# Altium PCB PCB_simple.PcbDoc
Units mil, origin at the board's own origin, x right, y up, seen from the top; angles counter-clockwise.
Board outline 3000 x 2000 mil, 2 copper layers (Top Layer, Bottom Layer), stack 60.4 mil thick; 65 components, 51 nets, 204 pads, 0 vias.
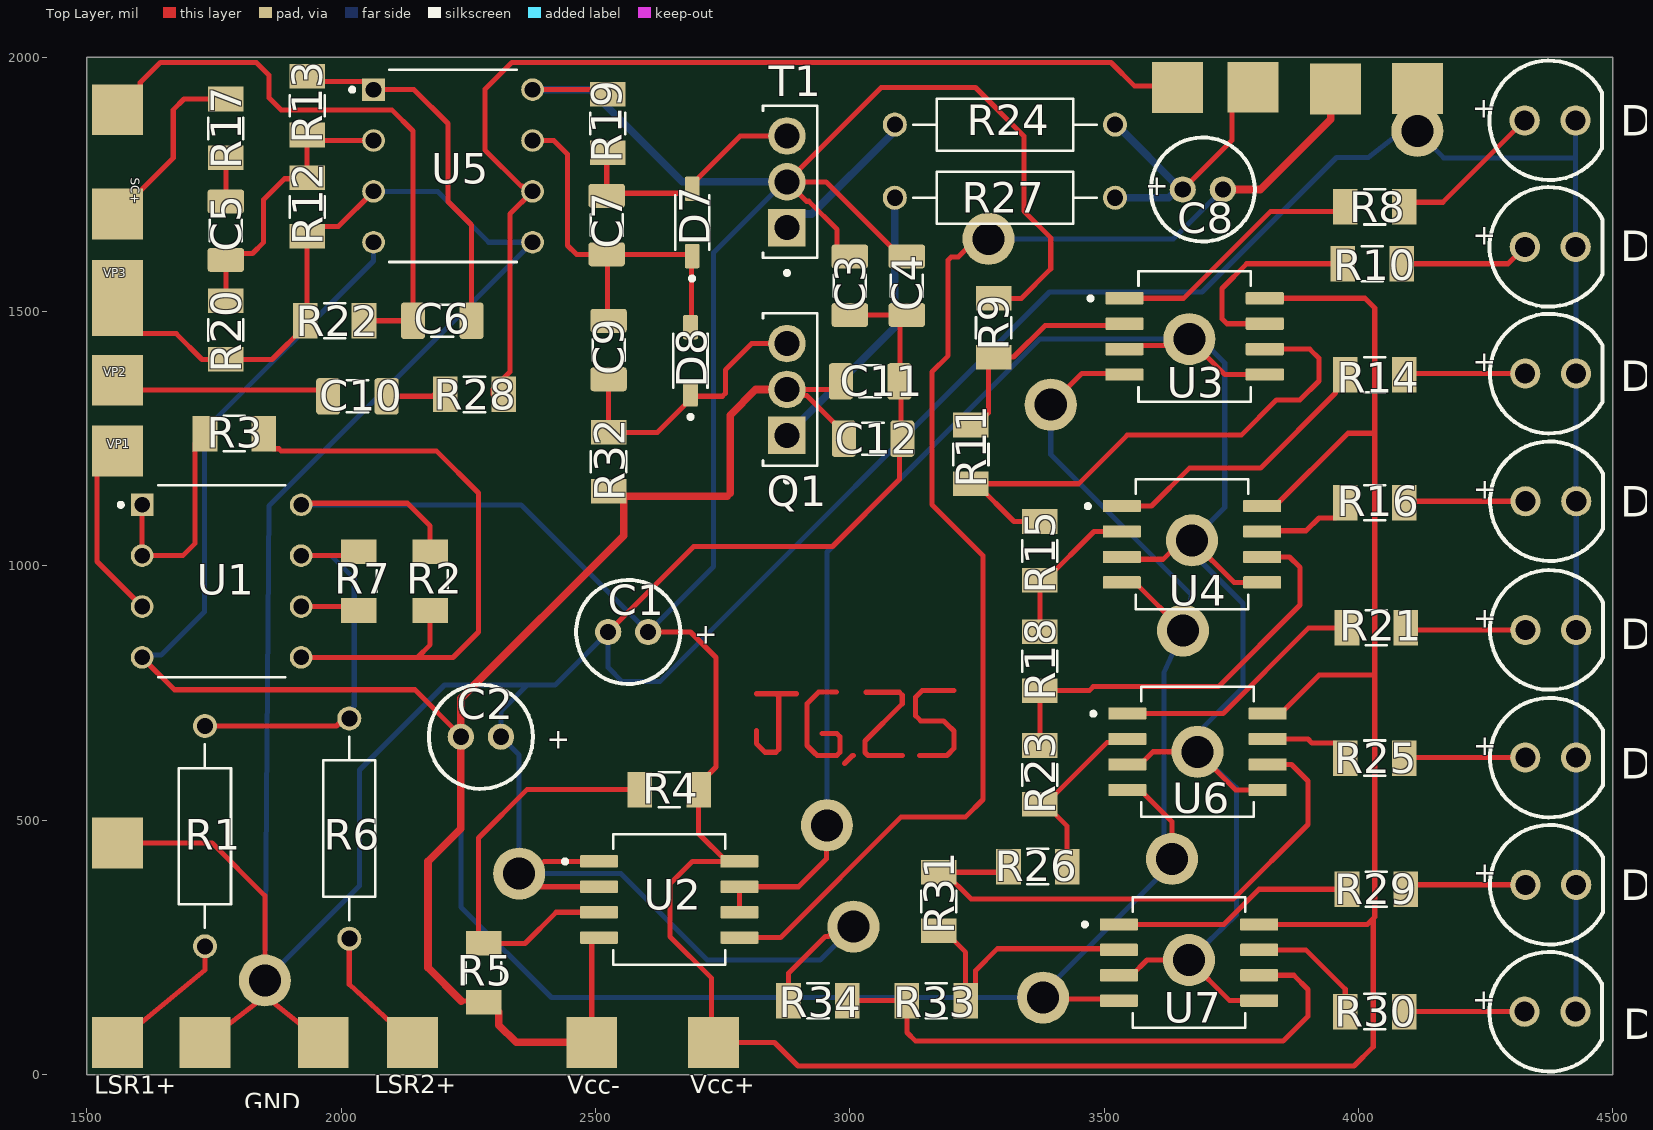
[diagram p0: Top Layer view]
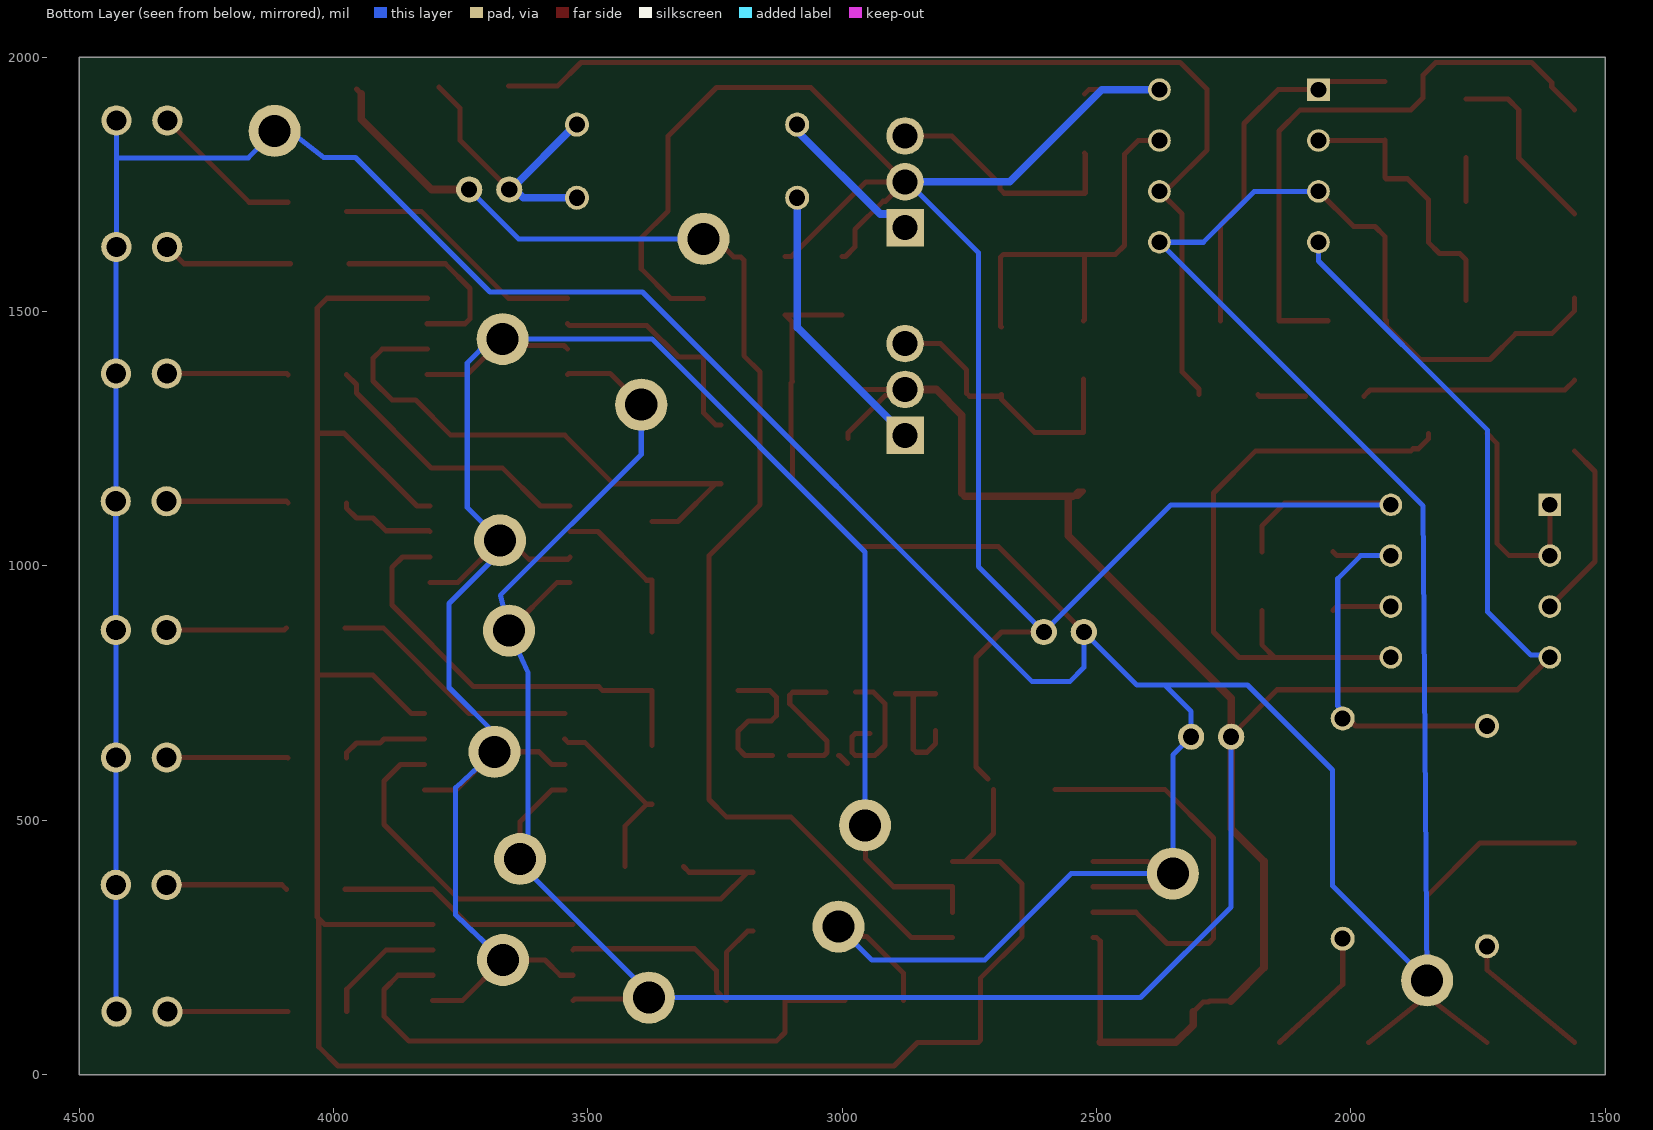
[diagram p1: Bottom Layer view, seen from below]
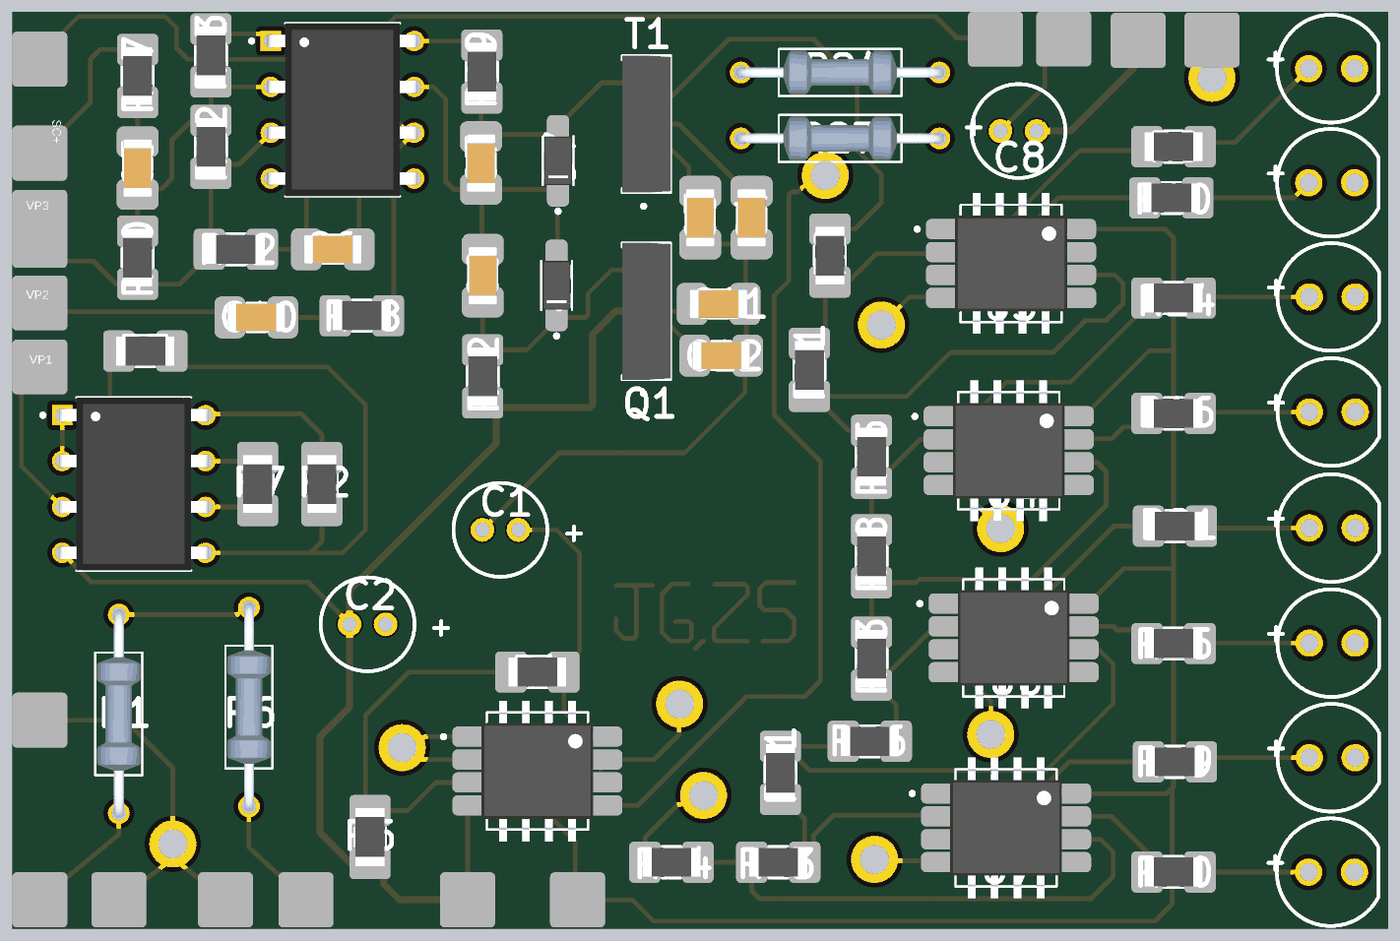
[diagram p2: 3D render of the assembled board from above, using the file's embedded part models]

## Layer stack, top to bottom
Top Solder: solder mask 0.5, Solder Resist, Dk 3.3
Top Layer: signal copper 0.7
Dielectric1: core 59, FR-4, Dk 4.3
Bottom Layer: signal copper 0.7
Bottom Solder: solder mask 0.5, Solder Resist, Dk 3.3

## Board outline
1500,0 4500,0 4500,2000 1500,2000

## Design rules (kind name [scope] priority, off if disabled: settings)
Clearance [All] p1: gap=10 ignorepadtopadclearanceinfootprint=FALSE
DiffPairsRouting [All] p1: maxlimit=10 minlimit=10 mostfreqgap=10 toplayer_minwidth=10 toplayer_maxwidth=10 toplayer_prefwidth=10 bottomlayer_minwidth=10 bottomlayer_maxwidth=10 bottomlayer_prefwidth=10 maxuncoupledlength=500
HoleSize [All] p1: absolutevalues=TRUE maxlimit=300 minlimit=10 maxpercent=80.000 minpercent=20.000
MinimumAnnularRing [All] p1: minimumring=10
MinimumSolderMaskSliver [All] p1: minsoldermaskwidth=19.68
PasteMaskExpansion [All] p1: expansion=10
PlaneClearance [All] p1: clearance=15
PlaneConnect [All] p1: pad.planeconnectstyle=Relief pad.reliefexpansion=20 pad.reliefentries=4 pad.reliefconductorwidth=10 pad.reliefairgap=10 via.planeconnectstyle=Direct via.reliefexpansion=20 via.reliefentries=4 via.reliefconductorwidth=10 via.reliefairgap=10
PolygonConnect [All] p1: thpad.connectstyle=Relief thpad.reliefconductorwidth=10 thpad.reliefentries=4 thpad.polygonreliefangle="90 Angle" thpad.airgapwidth=10 smdpad.connectstyle=Relief smdpad.reliefconductorwidth=10 smdpad.reliefentries=4 smdpad.polygonreliefangle="90 Angle" smdpad.airgapwidth=10 via.connectstyle=Direct via.reliefconductorwidth=10 via.reliefentries=4 via.polygonreliefangle="90 Angle" via.airgapwidth=10
RoutingVias [All] p1: holewidth=10 width=20 viastyle="Through Hole" minholewidth=10 minwidth=20 maxholewidth=10 maxwidth=20
SMDNeckDown [All] p1: percent=100.000
SilkToSolderMaskClearance SilkscreenOverComponentPads [IsPad] p1: minsilkscreentomaskgap=10 clearancetoexposedcopper=TRUE
SolderMaskExpansion [All] p1: expansion=10 istentingtop=FALSE
SupplyNets "Schematic Supply Nets" [InNet('GND')] p1: voltage=0.000
Width [All] p1: maxlimit=20 minlimit=10 preferedwidth=10
23 further rules are at their usual default settings.

## Components (designator, comment, footprint, x,y, rotation, side; value= is the part's Value field where it differs from the comment)
C1 "WCAP-ATG8_5X11" WCAP-ATG8_5X11(DXL) 2564.29,870 r0 top value=0µF
C2 "WCAP-ATG8_5X11" WCAP-ATG8_5X11(DXL) 2274.69,664.02 r0 top value=0µF
C3 "CL31B106KAHNNNE" CAPC3216X180N 3000,1550.8 r90 top value=0µF
C4 "CL31B106KAHNNNE" CAPC3216X180N 3112.09,1550.8 r90 top value=0µF
C5 "CL31B106KAHNNNE" CAPC3216X180N 1773.27,1658.95 r270 top value=0µF
C6 "CL31B106KAHNNNE" CAPC3216X180N 2198.82,1481.81 r180 top value=0µF
C7 "CL31B106KAHNNNE" CAPC3216X180N 2522.13,1670 r90 top value=0µF
C8 "WCAP-ATG8_5X11" WCAP-ATG8_5X11(DXL) 3693.89,1739.8 r180 top value=0µF
C9 "CL31B106KAHNNNE" CAPC3216X180N 2525.77,1424.33 r90 top value=0µF
C10 "CL31B106KAHNNNE" CAPC3216X180N 2031.98,1333.39 r0 top value=0µF
C11 "CL31B106KAHNNNE" CAPC3216X180N 3039.91,1362.65 r0 top value=0µF
C12 "CL31B106KAHNNNE" CAPC3216X180N 3045.67,1250 r0 top value=0µF
D1 "WL-TMRC_5MM" WL-TMRC_5MM 4376.79,1875.8 r0 top
D2 "WL-TMRC_5MM" WL-TMRC_5MM 4377,1627 r0 top
D3 "WL-TMRC_5MM" WL-TMRC_5MM 4377.82,1378 r0 top
D4 "WL-TMRC_5MM" WL-TMRC_5MM 4378.1,1127 r0 top
D5 "WL-TMRC_5MM" WL-TMRC_5MM 4378.03,874 r0 top
D6 "WL-TMRC_5MM" WL-TMRC_5MM 4377.89,623 r0 top
D7 "1N4148W-13-F" SOD3715X135N 2690,1675 r90 top
D8 "1N4148W-13-F" SOD3715X135N 2686.77,1403.07 r90 top
D9 "WL-TMRC_5MM" WL-TMRC_5MM 4378.03,373 r0 top
D10 "WL-TMRC_5MM" WL-TMRC_5MM 4376.48,123.5 r0 top
Q1 "BD140" TO229P760X270X1364-3 2882.5,1346.77 r90 top
R1 "MFR-25FRF52-10K5" RESAD1100W55L680D260 1732.28,468.6 r90 top value=0
R2 "RMCF1206ZT0R00" RESC3216X70N 2175,970 r90 top value=0
R3 "RMCF1206ZT0R00" RESC3216X70N 1790,1260 r180 top value=0
R4 "RMCF1206ZT0R00" RESC3216X70N 2645,560 r0 top value=0
R5 "RMCF1206ZT0R00" RESC3216X70N 2280,200 r90 top value=0
R6 "MFR-25FRF52-10K5" RESAD1100W55L680D260 2015.99,483.59 r90 top value=0
R7 "RMCF1206ZT0R00" RESC3216X70N 2035,970 r270 top value=0
R8 "RMCF1206ZT0R00" RESC3216X70N 4031.95,1705.74 r180 top value=0
R9 "RMCF1206ZT0R00" RESC3216X70N 3282.71,1468.09 r90 top value=0
R10 "RMCF1206ZT0R00" RESC3216X70N 4027,1593.98 r180 top value=0
R11 "RMCF1206ZT0R00" RESC3216X70N 3238.02,1219.08 r90 top value=0
R12 "RMCF1206ZT0R00" RESC3216X70N 1933.2,1705.51 r90 top value=0
R13 "RMCF1206ZT0R00" RESC3216X70N 1933.2,1904.6 r90 top value=0
R14 "RMCF1206ZT0R00" RESC3216X70N 4031.95,1375.67 r180 top value=0
R15 "RMCF1206ZT0R00" RESC3216X70N 3373.54,1029.4 r90 top value=0
R16 "RMCF1206ZT0R00" RESC3216X70N 4031.95,1123.96 r180 top value=0
R17 "RMCF1206ZT0R00" RESC3216X70N 1773.27,1860.05 r270 top value=0
R18 "RMCF1206ZT0R00" RESC3216X70N 3373.54,812.42 r90 top value=0
R19 "RMCF1206ZT0R00" RESC3216X70N 2523.95,1869.59 r90 top value=0
R20 "RMCF1206ZT0R00" RESC3216X70N 1773.27,1463.61 r270 top value=0
R21 "RMCF1206ZT0R00" RESC3216X70N 4035.08,878.13 r180 top value=0
R22 "RMCF1206ZT0R00" RESC3216X70N 1987.32,1481.81 r0 top value=0
R23 "RMCF1206ZT0R00" RESC3216X70N 3373.54,589.06 r90 top value=0
R24 "MFR-25FRF52-10K5" RESAD1100W55L680D260 3305,1867.34 r180 top value=0
R25 "RMCF1206ZT0R00" RESC3216X70N 4031.95,621.97 r180 top value=0
R26 "RMCF1206ZT0R00" RESC3216X70N 3369.65,408.84 r0 top value=0
R27 "MFR-25FRF52-10K5" RESAD1100W55L680D260 3305,1723.65 r0 top value=0
R28 "RMCF1206ZT0R00" RESC3216X70N 2262.13,1336.93 r0 top value=0
R29 "RMCF1206ZT0R00" RESC3216X70N 4035.08,364.15 r180 top value=0
R30 "RMCF1206ZT0R00" RESC3216X70N 4031.95,123.79 r180 top value=0
R31 "RMCF1206ZT0R00" RESC3216X70N 3175,340 r90 top value=0
R32 "RMCF1206ZT0R00" RESC3216X70N 2525.77,1204.65 r90 top value=0
R33 "RMCF1206ZT0R00" RESC3216X70N 3170,145.15 r0 top value=0
R34 "RMCF1206ZT0R00" RESC3216X70N 2937.28,145.15 r0 top value=0
T1 "BD139" BD139-TO 2882.5,1755 r90 top
U1 "NE5532P" DIP794W45P254L959H508Q8#1 1765,970 r0 top
U2 "LM358PSR" SOIC127P780X200-8N 2645,344.08 r0 top
U3 "LM358PSR" SOIC127P780X200-8N 3677.76,1451 r0 top
U4 "LM358PSR" SOIC127P780X200-8N 3672.7,1042.59 r0 top
U5 "NE5532P" DIP794W45P254L959H508Q8#2 2220,1786.16 r0 top
U6 "LM358PSR" SOIC127P780X200-8N 3683.46,634.46 r0 top
U7 "LM358PSR" SOIC127P780X200-8N 3666.86,220.15 r0 top

## Footprints (in the part's own frame and the unit in brackets; to place one, negate y for a bottom-side part, rotate by r counter-clockwise, add the part's x,y. Pads: shape width x height; smd on the part's side, far side on the other; paste and mask are expansions set on the pad)
BD139-TO [mm] "Modelt hrough holer"
  round 1.875 hole 1.25: 1(2.29,0.155) 2(0,0.155)
  rect 1.875x1.875 / inner round 1.875 / far side rect 1.875x1.875 hole 1.25: 3(-2.29,0.155)
  silkscreen extent -4.65,-1.35 3.8,1.35, body extent -3.8,-1.35 3.8,1.35, height 13.64
CAPC3216X180N [mm]
  rrect25% 1.2x1.82 smd: 1(-1.46,0) 2(1.46,0)
  silkscreen extent -0.54,-0.8 0.54,0.8, body extent -1.6,-0.8 1.6,0.8, height 1.8
DIP794W45P254L959H508Q8#1 [mm]
  rect 1.13x1.13 / inner round 1.13 / far side rect 1.13x1.13 hole 0.78: 1(-3.97,3.81)
  round 1.13 hole 0.78: 2(-3.97,1.27) 3(-3.97,-1.27) 4(-3.97,-3.81) 5(3.97,-3.81) 6(3.97,-1.27) 7(3.97,1.27) 8(3.97,3.81)
  silkscreen extent -5.13,-4.79 3.17,4.79, body extent -4.15,-4.79 4.15,4.79, height 5.08
DIP794W45P254L959H508Q8#2 [mm]
  rect 1.13x1.13 / inner round 1.13 / far side rect 1.13x1.13 hole 0.78: 1(-3.97,3.81)
  round 1.13 hole 0.78: 2(-3.97,1.27) 3(-3.97,-1.27) 4(-3.97,-3.81) 5(3.97,-3.81) 7(3.97,1.27) 8(3.97,3.81)
  round 1.13 hole 0.78 mask+0.254: 6(3.97,-1.27)
  silkscreen extent -5.13,-4.79 3.17,4.79, body extent -4.15,-4.79 4.15,4.79, height 5.08
RESAD1100W55L680D260 [mm]
  round 1.2 hole 0.8: 1(-5.5,0) 2(5.5,0)
  silkscreen extent -4.58,-1.3 4.58,1.3, body extent -5.77,-1.2 5.77,1.2, height 2.4
RESC3216X70N [mm]
  rect 1.23x1.77 smd: 1(-1.466,0) 2(1.466,0)
  silkscreen extent -0.53,-0.88 0.53,0.88, body extent -1.6,-0.8 1.6,0.8, height 0.7
SOD3715X135N [mm]
  rrect18% 1.21x0.73 smd: A(1.68,0) C(-1.68,0)
  silkscreen extent -2.9,-0.85 1.35,0.85, body extent -1.83,-0.77 1.83,0.77, height 0.74
SOIC127P780X200-8N [mm]
  rrect15% 1.9x0.61 smd: 1(-3.505,1.905) 2(-3.505,0.635) 3(-3.505,-0.635) 4(-3.505,-1.905) 5(3.505,-1.905) 6(3.505,-0.635) 7(3.505,0.635) 8(3.505,1.905)
  silkscreen extent -5.3,-3.25 2.8,3.25, body extent -3.9,-3.1 3.9,3.1, height 2
TO229P760X270X1364-3 [mm]
  rect 1.875x1.875 / inner round 1.875 / far side rect 1.875x1.875 hole 1.25: 1(-2.29,0.155)
  round 1.875 hole 1.25: 2(0,0.155) 3(2.29,0.155)
  silkscreen extent -4.65,-1.35 3.8,1.35, body extent -3.8,-1.35 3.8,1.35, height 13.64
WCAP-ATG8_5X11(DXL) [mm]
  round 1.308 hole 0.8 mask+0.102: 1(1,0) 2(-1,0)
  silkscreen extent -2.6,-2.6 2.6,2.6
WL-TMRC_5MM [mm]
  round 1.508 hole 1: 1(-1.27,0) 2(1.27,0)
  silkscreen extent -3.03,-2.98 2.6,2.98

## Part data
C1 C2 C8: library part CMP-001-00083-1, "CAP ALUM 33UF 20% 35V RADIAL TH", Case/Package="Radial Wurth Electronics", Check_prices=https://www.snapeda.com/parts/860010572004/W%25C3%25BCrth+Elektronik+Midcom/view-part/?ref=eda, Component Type=Standard, Design Item ID=WCAP-ATG8_5X11, MF="WÃ¼rth Elektronik", MP=860010572004, Pins=2, SnapEDA_Link=https://www.snapeda.com/parts/860010572004/W%25C3%25BCrth+Elektronik+Midcom/view-part/?ref=snap, Source=WCAP-ATG8_5X11.SchLib
C3 C4 C5 C6 C7 C9 C10 C11 C12: library part CMP-001-00084-1, "CL31 Series 10 uF 25 V Â±10 % Tolerance X7R SMT Multilayer Ceramic Capacitor", Case/Package="SMD-2 Samsung", Check_prices=https://www.snapeda.com/parts/CL31B106KAHNNNE/Samsung/view-part/?ref=eda, Component Type=Standard, Design Item ID=CL31B106KAHNNNE, MF="Samsung Electro-Mechanics", MP=CL31B106KAHNNNE, Pins=2, SnapEDA_Link=https://www.snapeda.com/parts/CL31B106KAHNNNE/Samsung/view-part/?ref=snap, Source=CL31B106KAHNNNE.SchLib
D1 D2 D3 D4 D5 D6 D9 D10: library part CMP-004-00032-1, Case/Package=None, Availability=Unavailable, Component Type=Standard, Design Item ID=WL-TMRC_5MM, MF="{'manufacturer': u'Wurth Electronics'}", MP=151051RS11000, Pins=2, Price=None, Source=WL-TMRC_5MM.SchLib
D7 D8: library part CMP-004-00031-1, "Diode Switching 100V 0.15A 2Pin SOD123", Case/Package="SOD-123 Fairchild Semiconductor", Check_prices=https://www.snapeda.com/parts/1N4148W-13-F/Diodes+Inc./view-part/?ref=eda, Component Type=Standard, Design Item ID=1N4148W-13-F, MF="Diodes Inc.", MP=1N4148W-13-F, Pins=2, SnapEDA_Link=https://www.snapeda.com/parts/1N4148W-13-F/Diodes+Inc./view-part/?ref=snap, Source=1N4148W-13-F.SchLib
Q1: library part CMP-019-000000-1, "Bipolar (BJT) Transistor PNP 80 V 1.5 A - 1.25 W Through Hole TO-126-3", Package="TO-225-3 ON Semiconductor", Check_prices=https://www.snapeda.com/parts/BD140/Onsemi/view-part/?ref=eda, Component Type=Standard, Design Item ID=BD140, MF="ON Semiconductor", MP=BD140, Pin Count=3, SnapEDA_Link=https://www.snapeda.com/parts/BD140/Onsemi/view-part/?ref=snap, Source=BD140.SchLib
R1 R6 R24 R27: library part CMP-009-00179-1, "10.5 kOhms Â±1% 0.25W, 1/4W Through Hole Resistor Axial - Metal Film", Case/Package="RADIAL-2 YAGEO", Check_prices=https://www.snapeda.com/parts/MFR-25FRF52-10K5/Yageo/view-part/?ref=eda, Component Type=Standard, Design Item ID=MFR-25FRF52-10K5, MF=Yageo, MP=MFR-25FRF52-10K5, Pins=2, SnapEDA_Link=https://www.snapeda.com/parts/MFR-25FRF52-10K5/Yageo/view-part/?ref=snap, Source=MFR-25FRF52-10K5.SchLib
R2 R3 R4 R5 R7 R8 R9 R10 R11 R12 R13 R14 R15 R16 R17 R18 R19 R20 R21 R22 R23 R25 R26 R28 R29 R30 R31 R32 R33 R34: library part CMP-009-00177-1, "0 Ohms Jumper 0.25W, 1/4W Chip Resistor 1206 (3216 Metric) Automotive AEC-Q200 Thick Film", Case/Package="3216 Stackpole", Check_prices=https://www.snapeda.com/parts/RMCF1206ZT0R00/Stackpole+Electronics/view-part/?ref=eda, Component Type=Standard, Design Item ID=RMCF1206ZT0R00, MF="Stackpole Electronics Inc", MP=RMCF1206ZT0R00, Pins=2, SnapEDA_Link=https://www.snapeda.com/parts/RMCF1206ZT0R00/Stackpole+Electronics/view-part/?ref=snap, Source=RMCF1206ZT0R00.SchLib
T1: library part CMP-012-00001-3, "Bipolar (BJT) Transistor NPN 80 V 1.5 A - 1.25 W Through Hole TO-126-3", Case/Package="TO-126 STMicroelectronics", Check_prices=https://www.snapeda.com/parts/BD139/Onsemi/view-part/?ref=eda, Component Type=Standard, Design Item ID=BD139, MF=ON, MP=BD139, Pins=3, SnapEDA_Link=https://www.snapeda.com/parts/BD139/Onsemi/view-part/?ref=snap, Source=BD139.SchLib
U1 U5: library part CMP-014-00003-1, "Dual, 30-V, 10-MHz, low-noise operational amplifier for audio applications", Case/Package="PDIP-8 Texas", Check_prices=https://www.snapeda.com/parts/NE5532P/Texas+Instruments/view-part/?ref=eda, Component Type=Standard, Design Item ID=NE5532P, MF="Texas Instruments", MP=NE5532P, Pins=8, SnapEDA_Link=https://www.snapeda.com/parts/NE5532P/Texas+Instruments/view-part/?ref=snap, Source=NE5532P.SchLib
U2 U3 U4 U6 U7: library part CMP-014-00004-1, "Dual, 30-V, 700-kHz operational amplifier", Case/Package="SOP-8 Texas Instruments", Check_prices=https://www.snapeda.com/parts/LM358PSR/Texas+Instruments/view-part/?ref=eda, Component Type=Standard, Design Item ID=LM358PSR, MF="Texas Instruments", MP=LM358PSR, Pins=8, SnapEDA_Link=https://www.snapeda.com/parts/LM358PSR/Texas+Instruments/view-part/?ref=snap, Source=LM358PSR.SchLib

## Free pads (board coordinates)
  round 102.36 hole 62.99: 2(1850,185) 2(2350,395) 2(2955,490) 2(3007.28,290.68) 2(3272.67,1642.94) 2(3380,151.2) 2(3395,1316.84) 2(3633.48,423.82) 2(3654.99,872.7) 2(3666.86,225.03) 2(3667.44,1445.8) 2(3672.7,1050.03) 2(3683.46,634.46) 2(4115.72,1855.07)
  rect 100x100 smd: 3(1560,63.09) 3(1560,1225.51) 3(1560,1364.88) 3(1560,1691.56) 3(1560,1896.56) 3(1732.28,63.09) 3(1964.81,63.09) 3(2140.35,63.09) 3(2492.72,63.09) 3(2732.36,63.09) 3(3643.85,1940.25) 3(3792.77,1940.86) 3(3955.02,1937.42) 3(4115.72,1938.17) Pad(1560,455)
  rect 100x150 smd: 3(1560,1526.5)

## Nets (pads, with @x,y where several pads share a name; then routed paths per layer and width w, separated by ;. In a path a pad name is that pad's centre, name@x,y a point inside that pad or via, vN(x,y) a via of type N, cw(c..) or ccw(c..) an arc to the next point about the centre after c; other vN are vias at no path point)
GND: C1.2 C2.1 C3.1 C4.1 C11.2 C12.2 D1.2 D2.2 D3.2 D4.2 D5.2 D6.2 D9.2 D10.2 pad.2@1850,185 pad.2@2350,395 pad.2@3007.28,290.68 pad.2@4115.72,1855.07 pad.3@1560,1526.5 pad.3@1732.28,63.09 pad.3@1964.81,63.09 pad.3@4115.72,1938.17 pad.Pad R12.1 R20.2 R22.1 R34.1 U2.1 U2.2 U5.3 U5.5 | length 11796.3
  Top Layer w10: pad.Pad 1746.41,455 1850,351.41 pad.2@1850,185 ; pad.3@1560,1526.5 1560,1501.5 1605,1456.5 1675.94,1456.5 1726.55,1405.89 R20.2 1864.31,1405.89 1929.6,1471.18 R22.1 1933.2,1485.41 R12.1 1952.41,1667.01 1994.55,1667.01 U5.3 ; pad.3@1732.28,63.09 1832.33,139.78 1832.33,167.33 pad.2@1850,185 ; pad.3@1964.81,63.09 1867.67,140.41 1867.67,167.33 pad.2@1850,185 ; pad.2@2350,395 2374.99,395 2399.08,419.08 U2.1 ; pad.2@2380.88,369.08 U2.2 ; C1.2 2693.03,1038.11 2965.85,1038.11 3097.39,1169.65 3097.39,1244.24 C12.2 3100.27,1252.88 3100.27,1359.77 C11.2 3098.64,1363.89 3098.64,1479.87 C4.1 C3.1 ; R34.1 2879.57,199.16 2951.92,271.52 2958.15,271.52 2959.64,273 2989.61,273 pad.2@3007.28,290.68
  Bottom Layer w10: U5.3 2190.14,1736.16 2290.14,1636.16 U5.5 1858.11,1117.97 1850,185 2035.99,370.99 2035.99,598.56 2203.25,765.83 2365.96,765.83 ; pad.2@3007.28,290.68 2941.64,225.03 2719.79,225.03 2549.82,395 2350,395 2350,628.07 C2.1 2314.06,713.92 2365.96,765.83 ; D10.2 4427.25,124.28 4427.25,372.22 D9.2 4427.96,373.07 4427.96,622.93 D6.2 4427.96,623.07 4427.96,873.93 D5.2 4428.07,874.04 D4.2 D4.2 4427.96,1127.14 4427.96,1377.86 D3.2 4427.41,1378.41 4427.41,1626.59 D2.2 4426.9,1627.1 4426.9,1875.7 D1.2 ; 4426.79,1804.3 4424.54,1802.04 4420.47,1802.04 4167.68,1802.04 4118.67,1851.05 4115.72,1855.07 4093.87,1857.81 4089.81,1857.81 4019.18,1802.89 3956.73,1802.89 3692.24,1538.4 3392.53,1538.4 2626.51,772.38 2552.63,772.38 2524.92,800.09 C1.2 2420.75,765.83 2365.96,765.83
Gpot-leg1: pad.3@3643.85,1940.25 R28.2 U5.6 | length 2092.5
  Top Layer w10: R28.2@2298.35,1336.93 2298.35,1347.56 2331.7,1380.91 2331.7,1691.56 U5.6 2366.97,1736.16 2356.73,1746.39 2353.86,1746.39 2282.99,1817.27 2282.99,1937.02 2335.51,1989.54 3513.64,1989.54 3560.1,1943.09 pad.3@3656.29,1943.09
Gpot-leg2: C8.1 pad.3@3792.77,1940.86 R24.1 R27.2 | length 583.8
  Top Layer w10: C8.1 3751.46,1836.74 3751.46,1899.55 pad.3@3792.77,1940.86
  Bottom Layer w10: R24.1 R24.1@3524.25,1867.34 ; C8.1@3643.29,1739.8 C8.1 C8.1@3651.8,1739.8
  Bottom Layer w15: R27.2 3627.15,1723.65 C8.1@3643.29,1739.8 ; R24.1@3524.25,1867.34 C8.1@3651.8,1739.8
Laser1+: pad.3@1560,63.09 R1.1 | length 269.9
  Top Layer w10: pad.3@1560,63.09 1732.28,205.91 R1.1
Laser2+: pad.3@2140.35,63.09 R6.1 | length 258.6
  Top Layer w10: R6.1 2015.99,177.41 pad.3@2140.35,63.09
NetC5_1: C5.1 R17.2 | length 85.9
  Top Layer w10: C5.1 R17.2
NetC5_2: C5.2 R12.2 R13.1 R20.1 U5.2 | length 560.8
  Top Layer w10: R20.1 C5.2 1785.98,1614.18 1825.74,1614.18 1847.72,1636.16 1847.72,1720.14 1888.52,1760.94 1930.92,1760.94 R12.2 1933.2,1836.94 1933.99,1836.16 U5.2
NetC6_1: C6.1 R13.2 U5.1 | length 718
  Top Layer w10: R13.2@1933.2,1952.38 2047.48,1952.38 U5.1 2143.31,1936.16 2209.88,1869.59 2209.88,1716.42 2256.3,1670 C6.1
NetC7_1: C7.1 C9.2 D7.C D8.A U5.7 | length 782.7
  Top Layer w10: U5.7 2418.07,1836.16 2445,1809.23 2445,1630 2462.55,1612.45 C7.1@2522.2,1612.45 ; C9.2 2523.95,1483.63 2523.95,1610.7 C7.1@2522.2,1612.45 ; D8.A 2688.39,1470.83 2688.39,1607.24 2683.18,1612.45 C7.1@2522.2,1612.45
NetC7_2: C7.2 D7.A R19.1 T1.1 | length 486.3
  Top Layer w10: R19.1 2522.13,1810.05 2522.13,1732.99 2522.57,1732.55 2681.41,1732.55 D7.A 2690,1750.59 2784.56,1845.15 T1.1
NetC9_1: C9.1 D8.C Q1.3 R32.2 | length 562.7
  Top Layer w10: C9.1 R32.2 2621.65,1262.36 2686.77,1327.48 D8.C 2690.32,1333.39 2749.38,1333.39 2755.24,1339.24 2755.24,1385 2807.17,1436.93 Q1.3
NetC10_2: C10.2 R28.1 | length 94.9
  Top Layer w10: C10.2 2179.37,1333.39 R28.1@2182.91,1336.93
NetD1_1: D1.1 R8.1 | length 303.8
  Top Layer w10: R8.1@4089.69,1714.83 4165.82,1714.83 D1.1
NetD2_1: D2.1 R10.1 | length 256
  Top Layer w10: R10.1 4293.98,1593.98 D2.1
NetD3_1: D3.1 R14.1 | length 239.1
  Top Layer w10: R14.1 4092,1378 D3.1
NetD4_1: D4.1 R16.1 | length 239.7
  Top Layer w10: R16.1 4092.7,1127 D4.1
NetD5_1: D5.1 R21.1 | length 236.9
  Top Layer w10: R21.1 4096.93,874 D5.1
NetD6_1: D6.1 R25.1 | length 238.7
  Top Layer w10: R25.1 4090.7,623 D6.1
NetD9_1: D9.1 R29.1 | length 238.9
  Top Layer w10: R29.1 4101.65,373 D9.1
NetD10_1: D10.1 R30.1 | length 236.9
  Top Layer w10: R30.1 4089.95,123.5 D10.1
NetQ1_1: Q1.1 R27.1 | length 554.9
  Bottom Layer w15: Q1.1 3088.46,1468.68 R27.1
NetR1_2: R1.2 R6.2 R7.1 U1.7 | length 808.7
  Top Layer w10: R1.2 1990.92,685.14 2005.91,700.13 R6.2 ; U1.7 2027.28,1020 R7.1
  Bottom Layer w10: U1.7 1980.55,1020 2025.71,974.84 2025.71,724.61 2023.11,722.01 2023.11,707.25 R6.2
NetR2_1: R2.1 R3.1 U1.5 | length 1222.2
  Top Layer w10: R3.1 1847.72,1249.37 1866.93,1230.16 1877.56,1230.16 1882.2,1225.51 2187.72,1225.51 2270,1143.23 2270,870 2220,820 2150,820 ; U1.5 2150,820 ; R2.1 2175,845 2150,820
NetR3_2: R3.2 U1.1 U1.2 | length 438.1
  Top Layer w10: U1.1 U1.2 1688.86,1020 1713.07,1044.21 1713.07,1240.79 R3.2
NetR4_1: R4.1 R5.2 U2.3 | length 815.1
  Top Layer w10: U2.3 2422.91,319.08 2361.54,257.72 R5.2 2270,267.72 2270,465 2365,560 R4.1@2581.92,560
NetR7_2: R7.2 U1.6 | length 116.9
  Top Layer w10: U1.6 2027.28,920 R7.2
NetR8_2: R8.2 U3.1 | length 505.3
  Top Layer w10: U3.1 3656.29,1526 3827.31,1697.02 R8.2@3974.23,1697.02
NetR9_1: R9.1 R11.2 U3.2 | length 448.4
  Top Layer w10: R11.2 3248.65,1276.8 3272.67,1300.81 3272.67,1410.37 3322.01,1410.37 3384.17,1472.53 3536.29,1472.53 U3.2
NetR10_2: R10.2 U3.7 | length 405.3
  Top Layer w10: U3.7 3741.61,1476 3731.77,1485.83 3731.77,1545.43 3780.32,1593.98 R10.2
NetR11_1: R11.1 R15.2 U3.6 | length 1293.8
  Top Layer w10: R15.2 3322.9,1087.12 R11.1@3248.65,1161.36 ; U3.6 3904.32,1426 3922.16,1408.16 3922.16,1363.47 3885,1326.31 3838.9,1326.31 3769.57,1256.98 3545.47,1256.98 3449.86,1161.36 ; R11.1@3248.65,1161.36 3449.86,1161.36 ; R11.1@3248.65,1161.36 R11.1 3449.86,1161.36
NetR14_2: R14.2 U4.1 | length 556.3
  Top Layer w10: U4.1 3593,1117.59 3667.47,1192.06 3807.44,1192.06 3955.02,1339.63 3955.02,1356.46 R14.2
NetR15_1: R15.1 R18.2 U4.2 | length 302.4
  Top Layer w10: R18.2 R15.1 3384.17,971.69 3480.08,1067.59 U4.2
NetR16_2: R16.2 U4.7 | length 193.1
  Top Layer w10: U4.7 3812.11,1069.01 3897.05,1069.01 3922.16,1094.12 3955.02,1094.12 3974.23,1113.33 R16.2
NetR18_1: R18.1 R23.2 U4.6 | length 846.1
  Top Layer w10: R23.2 R18.1 3470.63,754.7 3478.33,762.41 3724.6,762.41 3885,922.81 3885,997.09 3864.5,1017.59 U4.6
NetR21_2: R21.2 U6.1 | length 501.8
  Top Layer w10: U6.1 3733.45,709.46 3902.12,878.13 R21.2
NetR23_1: R23.1 R26.2 U6.2 | length 365.4
  Top Layer w10: R23.1 R23.1@3384.17,531.35 ; R26.2 3427.36,488.16 R23.1@3384.17,531.35 ; U6.2 3538.46,652.45 3505.27,652.45 R23.1@3384.17,531.35
NetR24_2: R24.2 T1.3 | length 305.3
  Bottom Layer w10: T1.3 T1.3@2895.37,1683.81 ; R24.2@3088.46,1854.95 R24.2
  Bottom Layer w15: T1.3@2895.37,1683.81 2903.24,1691.68 2925.19,1691.68 3082.3,1848.78 3082.3,1852.44 3084.8,1854.95 R24.2@3088.46,1854.95
NetR25_2: R25.2 U6.7 | length 174.5
  Top Layer w10: U6.7 3900.62,659.46 3908.26,651.81 3955.02,651.81 3974.23,632.6 R25.2
NetR26_1: R26.1 R31.2 U6.6 | length 1127.6
  Top Layer w10: R26.1 3300.81,397.72 R31.2 3185.63,397.72 3238.02,345.32 3754.55,345.32 3900.62,491.39 3900.62,577.07 3868.23,609.46 U6.6
NetR29_2: R29.2 U7.1 | length 477.1
  Top Layer w10: U7.1 3735.29,295.15 3804.29,364.15 R29.2
NetR30_2: R30.2 U7.7 | length 245.2
  Top Layer w10: U7.7 3896.56,245.15 3973.94,167.77 3973.94,124.08 R30.2
NetR31_1: R31.1 R33.2 U7.2 | length 532.8
  Top Layer w10: R31.1 3185.63,282.28 3227.72,240.2 R33.2 3246.93,164.37 3246.93,204.16 3290,247.23 3526.79,247.23 U7.2
NetR33_1: R33.1 R34.2 U7.6 | length 1155.7
  Top Layer w10: R34.2 R33.1 3112.28,82.72 3129.49,65.51 3851.72,65.51 3900.62,114.4 3900.62,167.33 3872.8,195.15 U7.6
NetU2_6: pad.2@2955,490 pad.2@3666.86,225.03 pad.2@3667.44,1445.8 pad.2@3672.7,1050.03 pad.2@3683.46,634.46 U2.6 U2.7 U3.3 U3.5 U4.3 U4.5 U6.3 U6.5 U7.3 U7.5 | length 4461.5
  Top Layer w10: U2.6 U2.7 2899.08,369.08 2953.82,423.82 2953.82,488.82 pad.2@2955,490 ; U7.3 3554.26,195.15 3584.15,225.03 3666.86,225.03 3746.74,145.15 U7.5 ; U4.3 3539.26,1013.04 3616.1,1013.04 3653.09,1050.03 3672.7,1050.03 3755.14,967.59 U4.5 ; U3.3 3546.77,1433.01 3654.65,1433.01 3667.44,1445.8 3737.24,1376 U3.5 ; U6.3 3570.87,609.46 3595.87,634.46 3683.46,634.46 3758.46,559.46 U6.5
  Bottom Layer w10: pad.2@2955,490 2955,1027.26 3373.54,1445.8 3667.44,1445.8 3690.23,1445.8 3737.17,1398.87 3737.17,1114.5 3672.7,1050.03 3682.35,1040.38 3682.35,1016.65 3772.95,926.05 3772.95,760.93 3672.09,660.06 3683.46,634.46 3760,563.87 3760,313.29 pad.2@3666.86,225.03
PhotoSig: C6.2 pad.3@1560,1896.56 R22.2 | length 1171.9
  Top Layer w10: pad.3@1560,1896.56 1605,1941.56 1605,1950 1644.54,1989.54 ; 1648.61,1989.54 1833.11,1989.54 1858.11,1964.54 1858.11,1920.22 1881.77,1896.56 2099.73,1896.56 2141.34,1854.95 C6.2 R22.2
"Solar Cell +": pad.3@1560,1691.56 R17.1 | length 362.6
  Top Layer w10: pad.3@1560,1691.56 1670,1801.56 1670,1896.56 1691.2,1917.76 R17.1
Speaker-Leg1: C8.2 pad.2@3272.67,1642.94 pad.3@3955.02,1937.42 U2.5 | length 2618.1
  Top Layer w10: U2.5 2863.69,269.08 3101.11,506.5 3227.72,506.5 3261.77,540.56 3261.77,1019.94 3161.3,1120.42 3161.3,1381.15 3193.34,1413.19 3193.34,1601.15 3199.2,1607.01 3213.24,1607.01 3234.85,1628.62 pad.2@3260,1628.62 ; pad.3@3945.4,1927.8 pad.3@3955.02,1937.42
  Top Layer w15: C8.2 3806.92,1739.8 3945.4,1878.28 pad.3@3945.4,1927.8
  Bottom Layer w10: pad.2@3272.67,1642.94 3636.41,1642.94 C8.2
Vcc+: C1.1 C3.2 C4.2 pad.3@2732.36,63.09 R2.2 R4.2 R9.2 R19.2 T1.2 U1.8 U2.8 U3.8 U4.8 U5.8 U6.8 U7.8 | length 9173.9
  Top Layer w10: U1.8 1924.29,1122.99 2130.32,1122.99 2175,1078.3 R2.2 ; U5.8 2515.1,1936.16 R19.2 ; C1.1 2686.77,870 2736.77,820 2736.77,604.69 R4.2@2713.11,581.02 ; R4.2 2702.72,473.96 U2.8@2757.6,419.08 ; U2.8 U2.8@2757.6,419.08 ; C3.2 2993.63,1608.28 2975.08,1626.84 2975.08,1661.19 2919.52,1716.75 2914.65,1716.75 T1.2 ; C4.2 3099.88,1608.28 2953.17,1755 T1.2 ; R9.2@3272.67,1525.8 R9.2 3336.97,1525.8 3395,1583.83 3395,1644.91 3342.1,1697.81 3342.1,1845.2 3247.05,1940.25 3061.65,1940.25 T1.2 ; U7.8 4017.32,295.15 4028.97,306.81 ; U4.8 3836.08,1117.59 3979.17,1260.68 4031.95,1260.68 ; U3.8 4012.66,1526 4031.95,1506.71 4031.95,1260.68 ; U6.8 3846.85,709.46 3922.79,785.4 4031.97,785.4 ; U2.8@2757.6,419.08 2690.91,419.08 2646.22,374.4 2646.22,271.52 2727.74,190 2727.74,67.71 2732.36,63.09 2851.91,63.09 2898.23,16.77 3991.38,16.77 4028.97,54.37 4028.97,306.81 ; 4028.97,306.81 4031.97,309.81 4031.97,785.4 ; 4031.97,785.4 4031.97,1167.69 4031.95,1260.68
  Bottom Layer w10: U1.8 2353.66,1120 C1.1 2732.36,998.7 2732.36,1615.83 2871.52,1755 T1.2
  Bottom Layer w15: U5.8 2489.3,1936.16 2670.46,1755 T1.2@2871.52,1755
Vcc-: C2.2 C11.1 C12.1 pad.2@3380,151.2 pad.2@3395,1316.84 pad.2@3633.48,423.82 pad.2@3654.99,872.7 pad.3@2492.72,63.09 Q1.2 R5.1 R32.1 U1.4 U2.4 U3.4 U4.4 U5.4 U6.4 U7.4 | length 7898
  Top Layer w10: U1.4 1672.24,756.46 2145.02,756.46 2235.32,666.16 C2.2 ; 2236.02,144.56 2277.72,144.56 R5.1 2290.63,142.28 R5.1@2309.84,123.07 ; pad.3@2492.72,63.09 2492.72,262.07 2499.72,269.08 U2.4 ; R32.1@2555.61,1127.72 R32.1@2546.79,1136.54 ; 2759.22,1136.54 2765.08,1142.39 ; C11.1 2966.56,1346.77 Q1.2 2888.61,1334.56 2915.83,1334.56 2988.19,1262.2 C12.1 ; pad.2@3380,151.2 3383.02,148.17 3525.85,148.17 U7.4 ; pad.2@3395,1316.84 3456.16,1378 3537.76,1378 U3.4 ; U4.4 3560.1,967.59 3654.99,872.7 pad.2@3672.11,855.58 ; U6.4 3570.87,559.46 3633.48,496.84 pad.2@3633.48,423.82 ; R32.1@2546.79,1136.54 2536.4,1146.93 R32.1 2536.16,1136.54 R32.1@2546.79,1136.54
  Top Layer w15: 2236.02,144.56 2170.81,209.77 2170.81,419.08 2235.32,483.59 C2.2 2235.32,739.25 2555.61,1059.55 R32.1@2555.61,1127.72 ; R5.1@2309.84,123.07 2309.84,97.3 2344.06,63.09 pad.3@2492.72,63.09 ; R32.1@2546.79,1136.54 2759.22,1136.54 ; 2765.08,1142.39 2765.08,1296.42 2815.43,1346.77 Q1.2
  Bottom Layer w10: U1.4 1613.05,824.35 1645.94,824.35 1731.09,909.49 1731.09,1266.6 2063.7,1599.21 U5.4 ; C2.2 2235.32,329.25 2413.37,151.2 3380,151.2 3380,160.77 3633.48,414.25 3633.48,423.82 3617.28,440.02 3617.28,789.39 3654.99,872.7 3672.11,941.97 3395,1219.08 pad.2@3395,1316.84
Vpot-leg1: pad.3@1560,1225.51 U1.3 | length 358.7
  Top Layer w10: pad.3@1560,1225.51 1520.09,1185.6 1520.09,1008.61 U1.3
Vpot-leg2: C10.1 pad.3@1560,1364.88 | length 427.6
  Top Layer w10: pad.3@1560,1364.88 1579.29,1345.59 1962.3,1345.59 C10.1
copper on no net: | length 1192.4
  Top Layer w10: 2816.44,676.34 2816.44,650.41 2833.35,633.5 2840.05,633.5 2854.5,633.5 2860.36,639.36 2860.36,742.74 2854.5,748.6 ; 2816.44,748.6 2820.06,748.6 2825.54,748.6 2827.41,748.6 2854.5,748.6 ; 2895.37,748.6 2854.5,748.6 ; 2945.83,670.12 2974.59,670.12 2980.44,664.26 2980.44,633.42 2974.59,627.56 2935.19,627.56 2932.47,630.28 2916.03,646.72 2916.03,729.13 2938.64,751.75 2973.51,751.75 ; 2989.61,611.44 3005.42,627.24 3007.28,627.24 ; 3031.5,751.44 3097.29,751.44 3103.15,745.58 3103.15,728.91 3029.99,655.75 3029.99,633.1 3035.85,627.24 3103.15,627.24 ; 3136.61,627.24 3190.87,627.24 3204.99,641.37 3204.99,675.4 3199.13,681.26 3198.23,681.26 3184.18,695.31 3154.27,695.31 3139.32,695.31 3129.49,705.14 3129.49,712.08 3129.49,742.37 3141.83,754.7 3204.99,754.7

## Silkscreen, mask and mechanical layers (free items; w line width, h text height)
Top Overlay:
  text "SC+" at 1580.85,1762.77 h30 r270
  text "VP3" at 1531.93,1561.28 h30
  text "VP2" at 1531.93,1366.85 h30
  text "VP1" at 1539.3,1225.51 h30
  text "LSR1+" at 1515,-49.36 h60
  text "LSR2+" at 2065.02,-48.73 h60
  text "Vcc+" at 2686.77,-48.73 h60
  text "Vcc-" at 2444.21,-50 h60
  text "GND" at 1810,-84.36 h60

## Text inside footprints (layer, text, board x,y; h text height)
C1: Top Overlay "+" at 2694.21,846.38 h40; Top Assembly "+" at 2694.21,846.38 h40
C2: Top Overlay "+" at 2404.61,640.39 h40; Top Assembly "+" at 2404.61,640.39 h40
C8: Top Overlay "+" at 3626.8,1763.42 h40 r180; Top Assembly "+" at 3626.8,1763.42 h40 r180
D1: Top Overlay "+" at 4224.04,1880.45 h40; Top Assembly "+" at 4223.76,1880.96 h40
D2: Top Overlay "+" at 4224.24,1631.65 h40; Top Assembly "+" at 4223.97,1632.16 h40
D3: Top Overlay "+" at 4225.06,1382.65 h40; Top Assembly "+" at 4224.78,1383.16 h40
D4: Top Overlay "+" at 4225.35,1131.65 h40; Top Assembly "+" at 4225.07,1132.16 h40
D5: Top Overlay "+" at 4225.28,878.65 h40; Top Assembly "+" at 4225,879.16 h40
D6: Top Overlay "+" at 4225.14,627.65 h40; Top Assembly "+" at 4224.86,628.16 h40
D9: Top Overlay "+" at 4225.28,377.65 h40; Top Assembly "+" at 4225,378.16 h40
D10: Top Overlay "+" at 4223.72,128.15 h40; Top Assembly "+" at 4223.44,128.66 h40